# Altium PCB main.PcbDoc
Units mm, origin at the board's own origin, x right, y up, seen from the top; angles counter-clockwise.
Board outline 65.02 x 34.8 mm, 2 copper layers (Top Layer, Bottom Layer), stack 1.64 mm thick; 85 components, 60 nets, 273 pads, 80 vias.
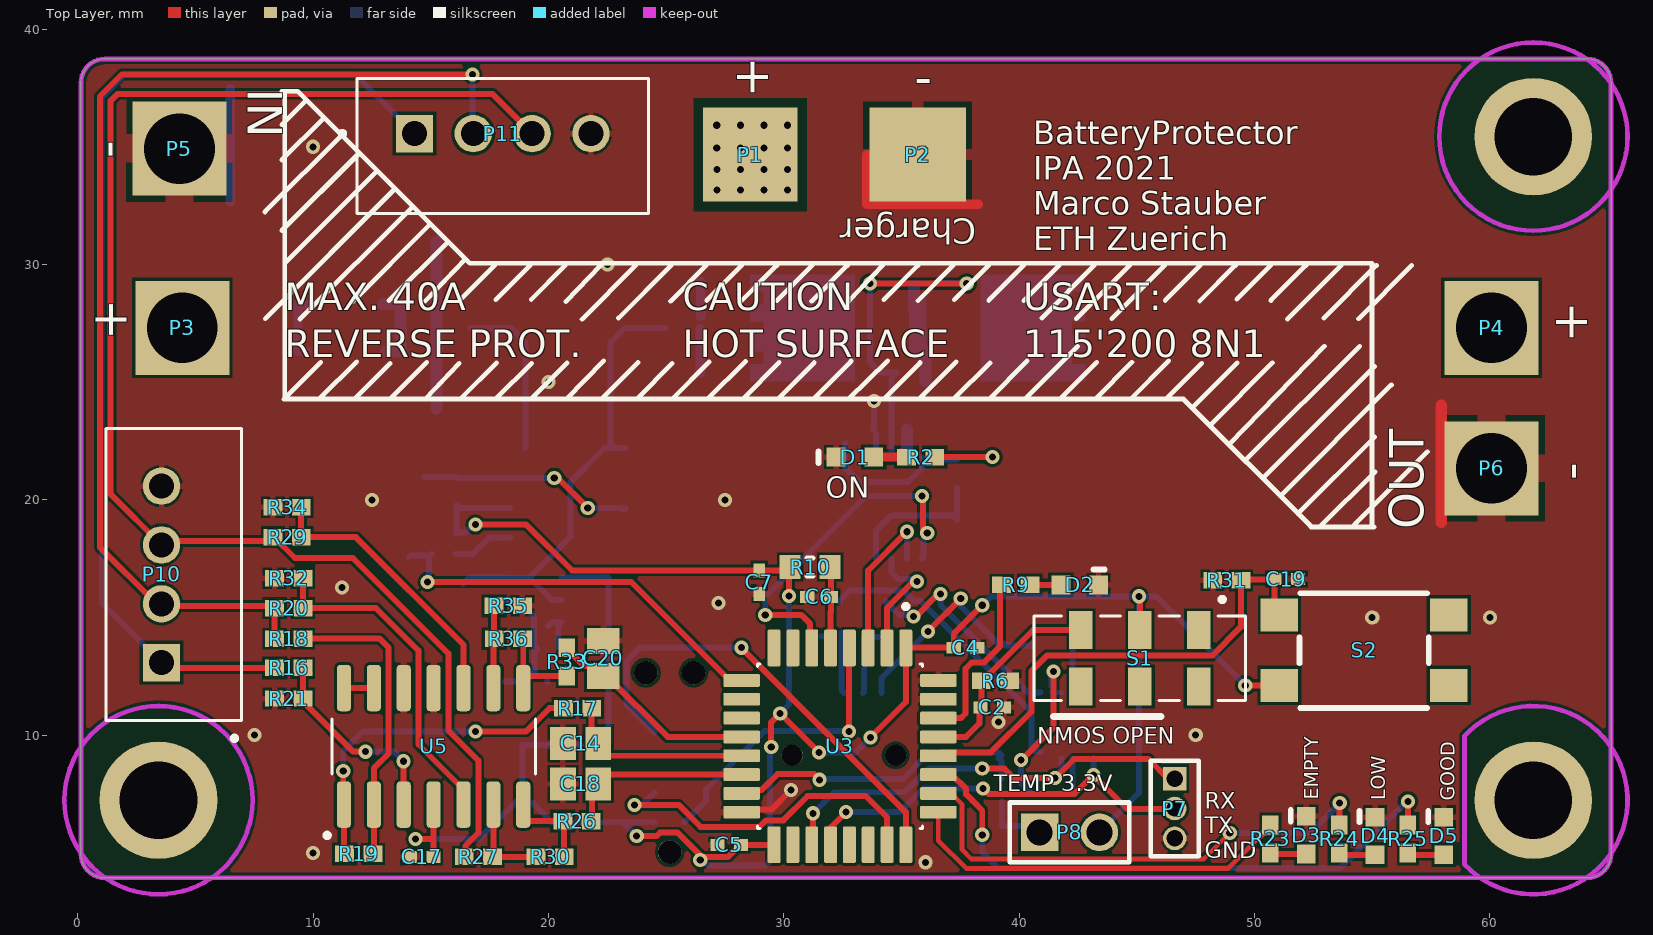
[diagram p0: Top Layer view]
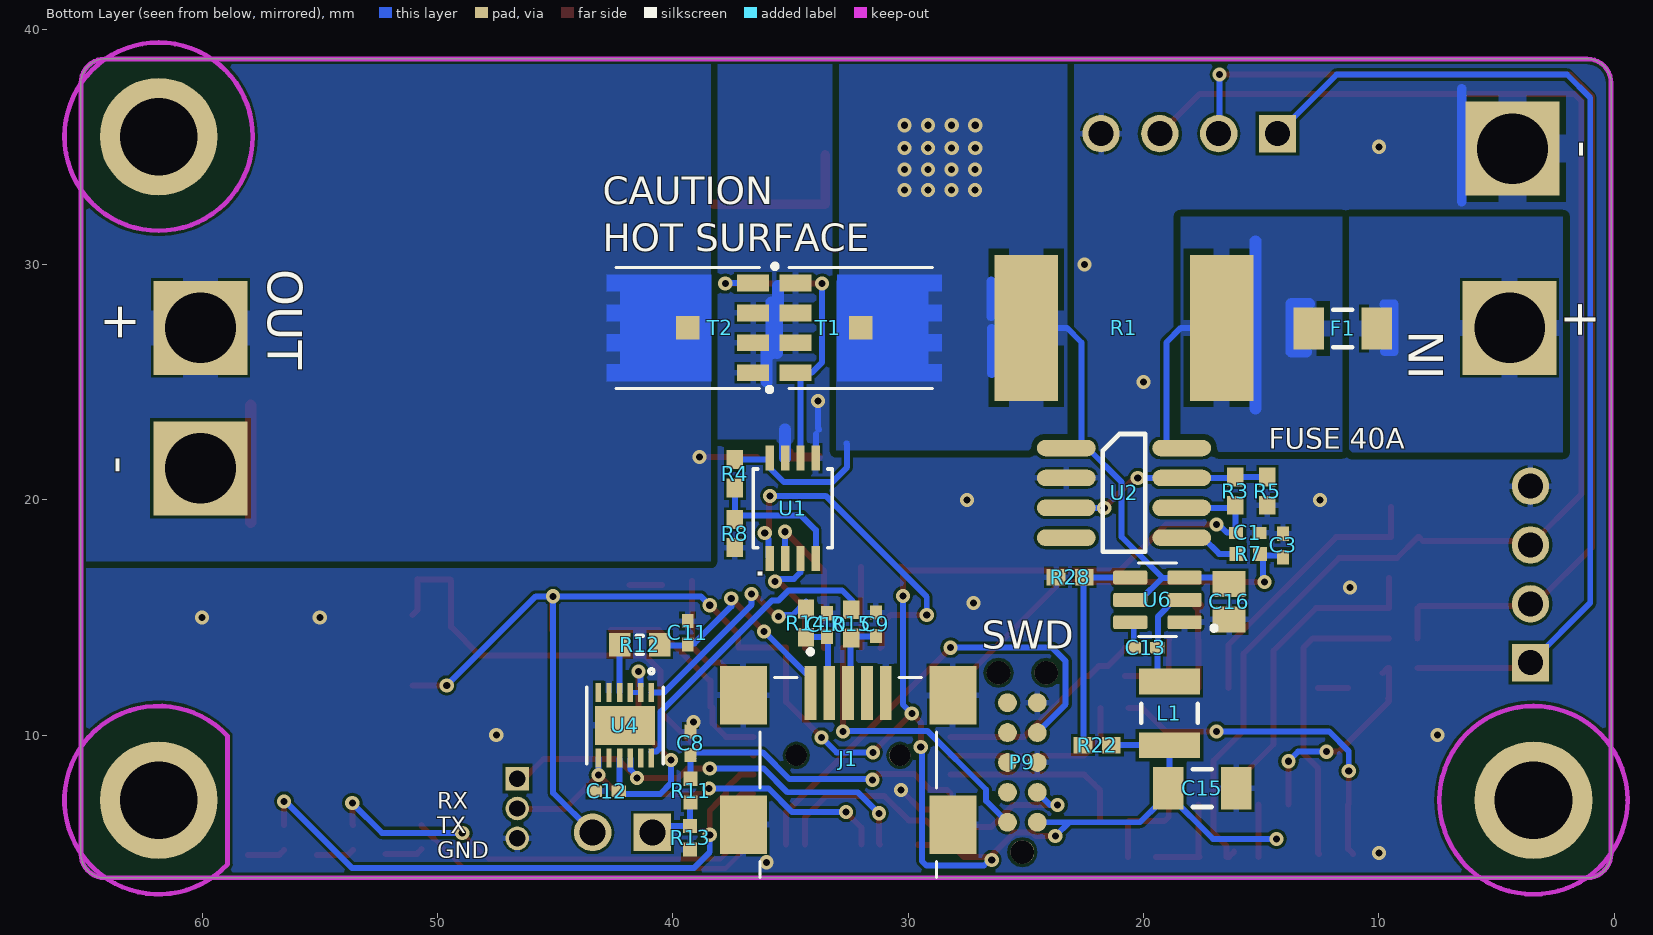
[diagram p1: Bottom Layer view, seen from below]
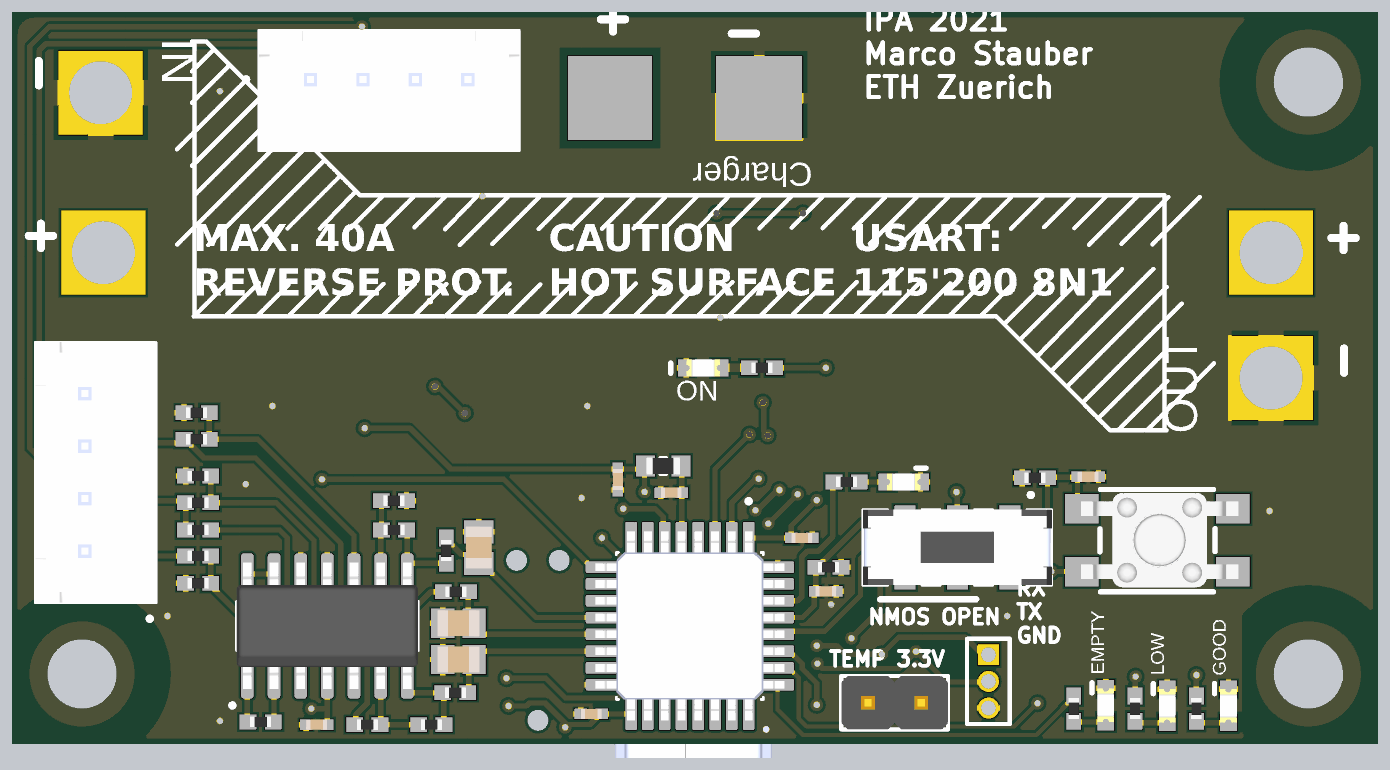
[diagram p2: 3D render of the assembled board from above, using the file's embedded part models]
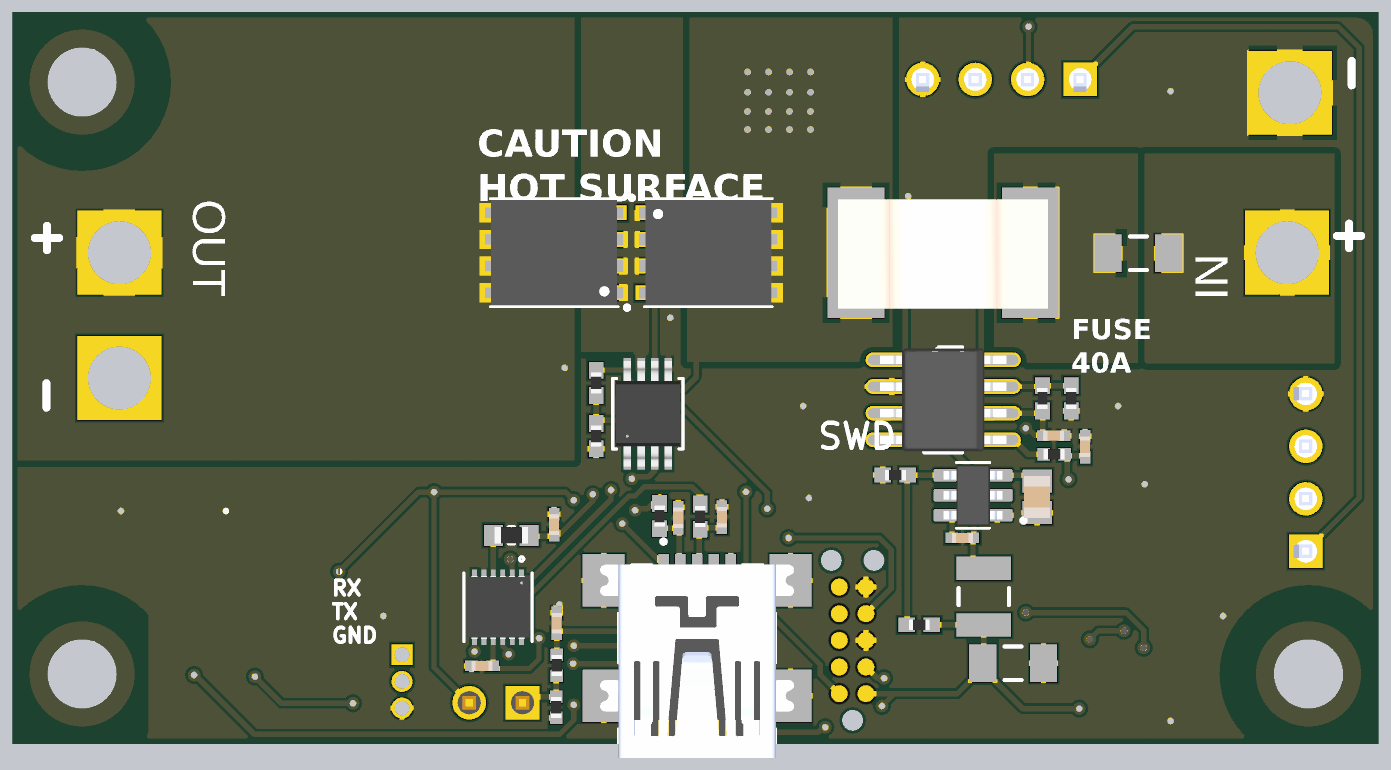
[diagram p3: 3D render of the assembled board from below, using the file's embedded part models]

## Layer stack, top to bottom
Top Solder: solder mask 0.0102, Solder Resist, Dk 3.5
Top Layer: signal copper 0.07
Dielectric 1: dielectric 1.5, FR-4, Dk 4.8
Bottom Layer: signal copper 0.07
Bottom Solder: solder mask 0.0102, Solder Resist, Dk 3.5

## Board outline
64.135,3.937 ccw(c64.135,4.953) 65.151,4.953 65.151,37.719 ccw(c64.135,37.719) 64.135,38.735 1.143,38.735 ccw(c1.143,37.723) 0.131,37.723 0.131,4.953 ccw(c1.146,4.953) 1.147,3.937 1.27,3.937

## Design rules (kind name [scope] priority, off if disabled: settings)
Clearance [InNet('VBAT') vs OnLayer('Top Layer')] p1: gap=0.127 ignorepadtopadclearanceinfootprint=FALSE except(0.2: Track-Track Track-THPad; 0.254: Track-Via THPad-THPad Via-Via; 0.3: Poly-Poly; 0.4: SMDPad-Poly)
Clearance Clearance_1 [All] p2: gap=0.127 ignorepadtopadclearanceinfootprint=FALSE except(0.2: Track-Track Track-THPad; 0.254: Track-Via THPad-THPad Via-Via; 0.3: Poly-Poly)
HoleSize [All] p1: absolutevalues=TRUE maxlimit=6.3 minlimit=0.025 maxpercent=80.000 minpercent=20.000
HoleToHoleClearance [All] p1: gap=0.2 allowstackedmicrovias=TRUE
PolygonConnect VBAT [InNet('VBAT') vs InNet('VBAT')] p1: thpad.connectstyle=Relief thpad.reliefconductorwidth=0.7 thpad.reliefentries=4 thpad.polygonreliefangle="90 Angle" thpad.airgapwidth=0.254 smdpad.connectstyle=Relief smdpad.reliefconductorwidth=1.5 smdpad.reliefentries=4 smdpad.polygonreliefangle="90 Angle" smdpad.airgapwidth=0.254 via.connectstyle=Direct via.reliefconductorwidth=0.254 via.reliefentries=4 via.polygonreliefangle="90 Angle" via.airgapwidth=0.254
PolygonConnect Fuse_Shaunt [InNet('NetF1_2') vs InNet('NetF1_2')] p2: thpad.connectstyle=Relief thpad.reliefconductorwidth=0.7 thpad.reliefentries=4 thpad.polygonreliefangle="90 Angle" thpad.airgapwidth=0.254 smdpad.connectstyle=Relief smdpad.reliefconductorwidth=0.7 smdpad.reliefentries=4 smdpad.polygonreliefangle="90 Angle" smdpad.airgapwidth=0.254 via.connectstyle=Relief via.reliefconductorwidth=0.254 via.reliefentries=4 via.polygonreliefangle="90 Angle" via.airgapwidth=0.254
PolygonConnect PWR_GND [InNet('GND') vs HasFootprint('AWG-10-Hole-1')] p3: thpad.connectstyle=Relief thpad.reliefconductorwidth=1.2 thpad.reliefentries=4 thpad.polygonreliefangle="90 Angle" thpad.airgapwidth=0.254 smdpad.connectstyle=Relief smdpad.reliefconductorwidth=0.5 smdpad.reliefentries=4 smdpad.polygonreliefangle="90 Angle" smdpad.airgapwidth=0.254 via.connectstyle=Relief via.reliefconductorwidth=0.5 via.reliefentries=4 via.polygonreliefangle="90 Angle" via.airgapwidth=0.254
PolygonConnect GND [InNet('GND') vs InNet('GND')] p4: thpad.connectstyle=Relief thpad.reliefconductorwidth=0.254 thpad.reliefentries=4 thpad.polygonreliefangle="90 Angle" thpad.airgapwidth=0.1 smdpad.connectstyle=Relief smdpad.reliefconductorwidth=0.254 smdpad.reliefentries=4 smdpad.polygonreliefangle="90 Angle" smdpad.airgapwidth=0.1 via.connectstyle=Direct via.reliefconductorwidth=0.254 via.reliefentries=4 via.polygonreliefangle="90 Angle" via.airgapwidth=0.1
PolygonConnect [All] p5: connectstyle=Relief reliefconductorwidth=0.254 reliefentries=4 polygonreliefangle="90 Angle" airgapwidth=0.1
RoomDefinition main [InComponentClass('main')] p1 off: confinementstyle=ConfineIn formatcopy=TRUE lockcomponents=FALSE outline 1.274,2547.747 6.227,2547.747 6.227,2548.865 1.274,2548.865
RoutingVias [All] p1: holewidth=0.3 width=0.6 viastyle="Through Hole" minholewidth=0.3 minwidth=0.6 maxholewidth=10 maxwidth=20
SilkToSolderMaskClearance [IsPad] p1: minsilkscreentomaskgap=0.15 clearancetoexposedcopper=TRUE
SolderMaskExpansion [All] p1: expansion=0.05
Width [All] p1: maxlimit=20 minlimit=0.2 preferedwidth=0.254
27 further rules are at their usual default settings.

## Components (designator, comment, footprint, x,y, rotation, side; value= is the part's Value field where it differs from the comment)
C1 "100nF" "CAP_0402i_1005m -L" 15.57,18.593 r0 bottom
C2 "100nF" "CAP_0402i_1005m -L" 38.862,11.176 r180 top
C3 "200nF" "CAP_0402i_1005m -L" 14.072,18.059 r90 bottom
C4 "100nF" "CAP_0402i_1005m -L" 37.719,13.716 r0 top
C5 "100nF" "CAP_0402i_1005m -L" 27.686,5.334 r180 top
C6 "100nF" "CAP_0402i_1005m -L" 31.496,15.875 r0 top
C7 "100nF" "CAP_0402i_1005m -L" 28.956,16.502 r90 top
C8 "200nF" "CAP_0402i_1005m -L" 39.243,9.652 r90 bottom
C9 "47pF" "CAP_0402i_1005m -L" 31.369,14.707 r270 bottom
C10 "47pF" "CAP_0402i_1005m -L" 33.452,14.681 r270 bottom
C11 "100nF" "CAP_0402i_1005m -L" 39.37,14.351 r270 bottom
C12 "100nF" "CAP_0402i_1005m -L" 42.799,7.62 r180 bottom
C13 "100nF" "CAP_0402i_1005m -L" 19.914,13.716 r180 bottom
C14 "2.2uF" "CAP_0805i_2012m -L" 21.361,9.652 r0 top
C15 "47uF" "CAP_1206i_3216m -n" 17.501,7.747 r0 bottom
C16 "10uF" "CAP_0805i_2012m -L" 16.358,15.672 r90 bottom
C17 "100nF" "CAP_0402i_1005m -L" 14.605,4.826 r0 top
C18 "2.2uF" "CAP_0805i_2012m -L" 21.361,7.925 r0 top
C19 "100nF" "CAP_0402i_1005m -L" 51.354,16.633 r180 top
C20 "2.2uF" "CAP_0805i_2012m -L" 22.327,13.259 r270 top
D1 "Green" 0603_LED 33.02,21.819 r0 top
D2 "Red" 0603_LED 42.57,16.383 r180 top
D3 "Red" 0603_LED 52.201,5.753 r270 top
D4 "Orange" 0603_LED 55.122,5.715 r270 top
D5 "Green" 0603_LED 58.043,5.715 r270 top
F1 "40A Fuse" FUSE_1206I_3216M_N 11.532,27.28 r0 bottom
J1 "690-005-299-043" EDAC_690-005-299-043 32.553,9.144 r180 bottom
L1 "3.3uH" "IND_1210i_3225m -L" 18.898,10.922 r270 bottom
P1 "Charger +" AWG-10-Hole-1#1 28.575,34.671 r0 top
P2 "Charger -" AWG-10-Hole-1#2 35.687,34.671 r0 top
P3 "BAT +" AWG-10-Hole-1#3 4.445,27.305 r0 top
P4 "OUT +" AWG-10-Hole-1#3 60.071,27.305 r270 top
P5 "BAT -" AWG-10-Hole-1#3 4.318,34.925 r0 top
P6 "OUT -" AWG-10-Hole-1#3 60.071,21.336 r270 top
P7 "Header 3" "1.27mm HDR1X3" 46.609,8.153 r270 top
P8 "Temp-Sensor" HDR1X2 40.869,5.867 r0 top
P9 "Tag-Connect TC2050-IDC-NL-No pin assigned" "TAG-CONNECT TC2050-IDC-NL 10-Pin" 24.511,6.299 r90 bottom
P10 "XH Bat Balancer" JST_B4B-XH-A(LF)(SN) 3.556,13.081 r90 top
P11 "XH Charger Balancer" JST_B4B-XH-A(LF)(SN) 14.304,35.56 r0 top
R1 "200u" WSL3921L2000FEA 20.832,27.305 r0 bottom
R2 "10k" "RES_0402i_1005m -N" 35.814,21.819 r180 top
R3 "12k" "RES_0402i_1005m -N" 16.104,20.371 r90 bottom
R4 "12k" "RES_0402i_1005m -N" 37.363,21.107 r270 bottom
R5 "10k" "RES_0402i_1005m -N" 14.732,20.371 r90 bottom
R6 "10k" "RES_0402i_1005m -N" 38.989,12.319 r180 top
R7 "8.2k" "RES_0402m_1005i -L" 15.545,17.704 r180 bottom
R8 "1.5k" "RES_0402i_1005m -N" 37.363,18.567 r90 bottom
R9 "1k" "RES_0402i_1005m -N" 39.853,16.383 r180 top
R10 "FRB 600" "RES_0603i_1608m -N" 31.115,17.145 r180 top
R11 "8.2k" "RES_0402m_1005i -L" 39.243,7.645 r90 bottom
R12 "FRB 600" "RES_0603i_1608m -N" 41.402,13.843 r180 bottom
R13 "?" "RES_0402m_1005i -L" 39.268,5.647 r90 bottom
R14 "27" "RES_0402i_1005m -N" 34.341,14.757 r270 bottom
R15 "27" "RES_0402i_1005m -N" 32.41,14.732 r270 bottom
R16 "220k" "RES_0402i_1005m -N" 8.963,12.858 r180 top
R17 "10k" "RES_0402i_1005m -N" 21.234,11.151 r0 top
R18 "220k" "RES_0402i_1005m -N" 8.963,14.097 r180 top
R19 "110k" "RES_0402i_1005m -N" 11.938,4.953 r0 top
R20 "220k" "RES_0402i_1005m -N" 8.963,15.398 r180 top
R21 "110k" "RES_0402i_1005m -N" 8.963,11.557 r0 top
R22 "33.2k" "RES_0402i_1005m -N" 21.971,9.576 r180 bottom
R23 "1k" "RES_0402i_1005m -N" 50.673,5.588 r90 top
R24 "1k" "RES_0402i_1005m -N" 53.594,5.588 r90 top
R25 "1k" "RES_0402i_1005m -N" 56.515,5.588 r90 top
R26 "10k" "RES_0402i_1005m -N" 21.209,6.35 r0 top
R27 "220k" "RES_0402i_1005m -N" 17.018,4.826 r180 top
R28 "10k" "RES_0402i_1005m -N" 23.114,16.713 r180 bottom
R29 "220k" "RES_0402i_1005m -N" 8.89,18.415 r180 top
R30 "110k" "RES_0402i_1005m -N" 20.066,4.826 r180 top
R31 "10k" "RES_0402i_1005m -N" 48.822,16.579 r0 top
R32 "110k" "RES_0402i_1005m -N" 8.963,16.668 r0 top
R33 "10k" "RES_0402i_1005m -N" 20.777,13.116 r90 top
R34 "110k" "RES_0402i_1005m -N" 8.89,19.685 r0 top
R35 "220k" "RES_0402i_1005m -N" 18.288,15.494 r0 top
R36 "110k" "RES_0402i_1005m -N" 18.292,14.097 r0 top
S1 "JS202011JCQN" SW_JS202011JCQN 45.125,13.265 r270 top
S2 "TL3305AF160QG" TL3305AF160QG 51.054,15.113 r0 top
T1 "CSD16570Q5B" CSD16570Q5B 32.021,27.305 r180 bottom
T2 "CSD16570Q5B" CSD16570Q5B 39.361,27.305 r0 bottom
U1 "MAX1614EUA+T" 21-0036K_MXM-L 34.9,19.634 r90 bottom
U2 "INA286AIDR" D0008A_M 20.828,20.295 r180 bottom value=Value
U3 "STM32L051K6T6" QFP80P900X900X160-32N 32.385,9.525 r270 top
U4 "FT234XD-R" DFN-12_FTD 42.037,10.414 r270 bottom
U5 "LM324KADR" SOIC127P600X175-14N 15.117,9.525 r90 top
U6 "TPS561201DDCR" SOT95P280X110-6N 19.406,15.748 r0 bottom

## Footprints (in the part's own frame and the unit in brackets; to place one, negate y for a bottom-side part, rotate by r counter-clockwise, add the part's x,y. Pads: shape width x height; smd on the part's side, far side on the other; paste and mask are expansions set on the pad)
"1.27mm HDR1X3" [mm] "Connector; Header; 1.27mm pitch; 3Position"
  rect 1x1 hole 0.7: 1(0,0)
  round 1 hole 0.7: 2(1.27,0) 3(2.54,0)
  silkscreen extent -0.76,-1.02 3.3,1.02
21-0036K_MXM-L [mil]
  rect 41.75x14 smd paste+0 mask+0: 1(-84.03,38.4) 2(-84.03,12.8) 3(-84.03,-12.8) 4(-84.03,-38.4) 5(84.03,-38.4) 6(84.03,-12.8) 7(84.03,12.8) 8(84.03,38.4)
  silkscreen extent -66,-66 66,66, body extent -99,-61 99,61, height 43
0603_LED [mm]
  rect 0.8x0.8 smd: 1(-0.8,0) 2(0.8,0)
  silkscreen extent -1.55,-0.25 -1.55,0.23, body extent -0.8,-0.4 0.8,0.4, height 0.65
AWG-10-Hole-1#1 [mm]
  rect 4x4 smd: 1(0,0)
AWG-10-Hole-1#2 [mm]
  rect 4.1x4 smd: 1(0,0)
AWG-10-Hole-1#3 [mm]
  rect 4x4 hole 3: 1(0,0)
"CAP_0402i_1005m -L" [mm] "Chip Capacitor, Body 1.0x0.5mm, IPC High Density"
  rect 0.6x0.5 smd: 1(-0.5,0) 2(0.5,0)
  body extent -0.5,-0.25 0.5,0.25, height 0.5
"CAP_0805i_2012m -L" [mm] "Chip Capacitor, Body 2.0x1.3mm, IPC High Density"
  rect 1.1x1.4 smd: 1(-0.75,0) 2(0.75,0)
  body extent -1,-0.62 1,0.63, height 0.6
"CAP_1206i_3216m -n" [mm] "Chip Capacitor, Body 3.2x1.6mm, IPC Medium Density"
  rect 1.3x1.8 smd: 1(-1.45,0) 2(1.45,0)
  silkscreen extent -0.4,-0.8 0.4,0.8, body extent -1.7,-0.9 1.7,0.9, height 1.35
CSD16570Q5B [mm] "Power NMOS"
  rect 1.372x0.71 smd paste-2: 1(-2.77,-0.635) 1(-2.77,0.635) 1(-2.77,1.905) 2(-2.77,-1.905)
  rect 1x1 smd: 3(0,0)
  Top Layer region: 3.456,1.55 2.866,1.55 2.866,0.99 3.456,0.99 3.456,0.28 2.866,0.28 2.866,-0.28 3.456,-0.28 3.456,-0.99 2.866,-0.99 2.866,-1.55 3.456,-1.55 3.456,-2.26 -0.984,-2.26 -0.984,2.26 3.456,2.26
  silkscreen extent -3.74,-2.58 3.05,2.72, body extent -3,-2.5 3,2.5, height 1.05
D0008A_M [mm]
  oval 2.5x0.7 smd paste-0.102 mask+0.051: 1(-2.45,1.905) 2(-2.45,0.635) 3(-2.45,-0.635) 4(-2.45,-1.905) 5(2.45,-1.905) 6(2.45,-0.635) 7(2.45,0.635) 8(2.45,1.905)
  silkscreen extent -0.9,-2.5 0.9,2.5, body extent -3.01,-2.45 3.01,2.45, height 1.63
DFN-12_FTD [mm]
  rect 0.808x0.229 smd paste+0 mask+0: 1(-1.395,1.125) 2(-1.395,0.675) 3(-1.395,0.225) 4(-1.395,-0.225) 5(-1.395,-0.675) 6(-1.395,-1.125) 7(1.395,-1.125) 8(1.395,-0.675) 9(1.395,-0.225) 10(1.395,0.225) 11(1.395,0.675) 12(1.395,1.125)
  rect 1.651x2.54 smd paste+0 mask+0: 13(0,0)
  silkscreen extent -2.4,-1.63 1.63,1.63, body extent -1.5,-1.5 1.5,1.5, height 0.81
EDAC_690-005-299-043 [mm]
  rect 0.5x2.3 smd: 1(-1.6,2.65) 2(-0.8,2.65) 3(0,2.65) 4(0.8,2.65) 5(1.6,2.65)
  rect 2x2.5 smd: S1(-4.45,2.55) S2(4.45,2.55) S3(4.45,-2.95) S4(-4.45,-2.95)
  round 0.9 hole 0.9 unplated: ""(-2.2,0) ""(2.2,0)
  silkscreen extent -3.75,-5.2 3.75,4.5, body extent -4.62,-5.9 4.62,3.3, height 3.98
FUSE_1206I_3216M_N [mm]
  rect 1.3x1.8 smd: 1(-1.45,0) 2(1.45,0)
  silkscreen extent -0.4,-0.8 0.4,0.8, body extent -1.68,-0.89 1.68,0.89, height 0.6
HDR1X2 [mm] "Connector; Header; 2 Position"
  rect 1.6x1.6 hole 1.1: 1(0,0)
  round 1.6 hole 1.1: 2(2.54,0)
  silkscreen extent -1.27,-1.27 3.81,1.27, body extent -1.27,-1.27 3.81,1.27, height 10.3
"IND_1210i_3225m -L" [mm] "Chip Inductor, Body 3.2x2.5mm, IPC High Density"
  rect 1.1x2.6 smd: 1(-1.35,0) 2(1.35,0)
  silkscreen extent -0.4,-1.2 0.4,1.2, body extent -1.7,-1.35 1.7,1.35, height 1.5
JST_B4B-XH-A(LF)(SN) [mm]
  rect 1.59x1.59 hole 1.06: 1(0,0)
  round 1.59 hole 1.06: 2(2.5,0) 3(5,0) 4(7.5,0)
  silkscreen extent -3.31,-3.4 9.95,2.35, body extent -2.44,-3.41 9.96,2.34, height 7
QFP80P900X900X160-32N [mm]
  rrect25% 1.56x0.55 smd: 1(-4.18,2.8) 2(-4.18,2) 3(-4.18,1.2) 4(-4.18,0.4) 5(-4.18,-0.4) 6(-4.18,-1.2) 7(-4.18,-2) 8(-4.18,-2.8) 17(4.18,-2.8) 18(4.18,-2) 19(4.18,-1.2) 20(4.18,-0.4) 21(4.18,0.4) 22(4.18,1.2) 23(4.18,2) 24(4.18,2.8)
  rrect25% 0.55x1.56 smd: 9(-2.8,-4.18) 10(-2,-4.18) 11(-1.2,-4.18) 12(-0.4,-4.18) 13(0.4,-4.18) 14(1.2,-4.18) 15(2,-4.18) 16(2.8,-4.18) 25(2.8,4.18) 26(2,4.18) 27(1.2,4.18) 28(0.4,4.18) 29(-0.4,4.18) 30(-1.2,4.18) 31(-2,4.18) 32(-2.8,4.18)
  silkscreen extent -6.04,-3.5 3.5,3.5, body extent -4.5,-4.5 4.5,4.5, height 1.61
"RES_0402i_1005m -N" [mm] "Chip Resistor, Body 1.1x0.5mm, IPC Medium Density"
  rect 0.8x0.7 smd: 1(-0.6,0) 2(0.6,0)
  body extent -0.5,-0.25 0.5,0.25, height 0.3
"RES_0402m_1005i -L" [mm] "Chip Resistor, Body 1.1x0.5mm, IPC High Density"
  rect 0.6x0.6 smd: 1(-0.5,0) 2(0.5,0)
  body extent -0.5,-0.25 0.5,0.25, height 0.3
"RES_0603i_1608m -N" [mm] "Chip Resistor, Body 1.6x0.8mm, IPC Medium Density"
  rect 0.9x1 smd: 1(-0.85,0) 2(0.85,0)
  silkscreen extent -0.13,-0.38 0.13,0.38, body extent -0.8,-0.4 0.8,0.4, height 0.4
SOIC127P600X175-14N [mm]
  rrect50% 1.97x0.6 smd: 1(-2.475,3.81) 2(-2.475,2.54) 3(-2.475,1.27) 4(-2.475,0) 5(-2.475,-1.27) 6(-2.475,-2.54) 7(-2.475,-3.81) 8(2.475,-3.81) 9(2.475,-2.54) 10(2.475,-1.27) 11(2.475,0) 12(2.475,1.27) 13(2.475,2.54) 14(2.475,3.81)
  silkscreen extent -3.88,-4.33 1.17,4.62, body extent -3.01,-4.32 3.01,4.32, height 1.75
SOT95P280X110-6N [mm]
  rrect25% 1.45x0.59 smd: 1(-1.155,0.95) 2(-1.155,0) 3(-1.155,-0.95) 4(1.155,-0.95) 5(1.155,0) 6(1.155,0.95)
  silkscreen extent -2.5,-1.57 0.8,1.57, body extent -1.4,-1.45 1.4,1.45, height 1.1
SW_JS202011JCQN [mm]
  rect 1.6x1 smd: 1(-1.2,2.5) 2(-1.2,0) 3(-1.2,-2.5) 5(1.2,2.5) 6(1.2,0) 7(1.2,-2.5)
  silkscreen extent -2.6,-4.5 1.8,4.5, body extent -1.8,-4.5 1.8,4.5, height 5.6
"TAG-CONNECT TC2050-IDC-NL 10-Pin" [mm] "Tag-Connect TC2050-IDC-NL 10-Pin No-Legs Cable with Ribbon connector."
  round 1 hole 1 unplated paste-2 mask+0: 0(-1.27,0.635) 0(6.35,-0.38) 0(6.35,1.65)
  round 0.8 smd paste-1 mask+0.102: 1(0,0) 2(1.27,0) 3(2.54,0) 4(3.81,0) 5(5.08,0) 6(5.08,1.27) 7(3.81,1.27) 8(2.54,1.27) 9(1.27,1.27) 10(0,1.27)
TL3305AF160QG [mm]
  rect 1.6x1.4 smd: 1(0,-3) 2(7.2,-3) 3(0,0) 4(7.2,0)
  silkscreen extent 0.86,-3.96 6.35,0.91, body extent -0.04,-3.75 7.46,0.75, height 3.8
WSL3921L2000FEA [mm] "RES 200 UOHM 1% 3W"
  rect 2.7x6.2 smd: 1(-4.15,0) 2(4.15,0)
  body extent -5,-2.54 5,2.66, height 0.83

## Part data
C1 C2 C3 C4 C5 C6 C7 C8 C9 C10 C11 C12 C13 C14 C15 C16 C17 C18 C19 C20: library part Cap, "capacitor"
D1 D2 D3 D4 D5: library part LTST-C191KRKT, "Red 631nm LED Indication - Discrete 2V 0603 _1608 Metric_", Package="0603 Lite-On", Digi-Key_Part_Number=160-1447-1-ND, Digi-Key_Purchase_URL=https://www.digikey.in/product-detail/en/lite-on-inc/LTST-C191KRKT/160-1447-1-ND/386836?utm_source=snapeda&utm_medium=aggregator&utm_campaign=symbol, MF="Lite-On Inc.", MP=LTST-C191KRKT, SnapEDA_Link=https://www.snapeda.com/parts/LTST-C191KRKT/Lite-On%20Inc./view-part/234319/?ref=snap
F1: library part Fuse, "Fuse"
J1: "USB - mini B USB 2.0 Receptacle Connector 5 Position Surface Mount, Right Angle", Package=None, Availability=Good, Check_prices=https://www.snapeda.com/parts/690-005-299-043/EDAC%20Inc./view-part/347309/?ref=eda, MF="EDAC Inc.", MP=690-005-299-043, Price=None, Purchase-URL=https://pricing.snapeda.com/search/part/690-005-299-043/?ref=eda, SnapEDA_Link=https://www.snapeda.com/parts/690-005-299-043/EDAC%20Inc./view-part/347309/?ref=snap
L1: library part Inductor, "Inductor"
P1 P2 P3 P4 P5 P6: library part Pin
P7: "Header, 3-Pin"
P8: library part "Header 2", "Header, 2-Pin"
P9: "10-pin pogo pin programing port"
P10 P11: library part "Header 4", "Header, 4-Pin"
R1: library part WSL3921L2000FEA, "RES 200 UOHM 1% 3W"
R2 R3 R4 R5 R6 R7 R8 R9 R10 R11 R12 R13 R14 R15 R16 R17 R18 R19 R20 R21 R22 R23 R24 R25 R26 R27 R28 R29 R30 R31 R32 R33 R34 R35 R36: library part Res, "Resistor"
S1: "Slide Switch DPDT Surface Mount", Package=None, Availability=Good, MF=C&K, MP=JS202011JCQN, Price=None, Purchase-URL=https://pricing.snapeda.com/search/part/JS202011JCQN/?ref=eda, SnapEDA_Link=https://www.snapeda.com/parts/JS202011JCQN/C&K/view-part/587766/?ref=snap
T1 T2: "Power NMOS", Built_By=EMA_UL_Team, Copyright="Copyright (C) 2018 Accelerated Designs. All rights reserved", Manufacturer_Part_Number=CSD16570Q5B, RefDes=RefDes, Type=DEV, Vendor="Texas Instruments"
U1 U4: "No Description Available", Built_By=EMA_UL_Team, Copyright="Copyright (C) 2018 Accelerated Designs. All rights reserved", RefDes=RefDes, Type=DEV
  U1: Manufacturer_Part_Number=MAX1614EUA+T, Revision=2, SourceLibrary=Maxim_2014-04-30_1, Vendor="Maxim Integrated Products"
  U4: Manufacturer_Part_Number=FT234XD-R, SourceLibrary=FTDI_2017-04-18, Vendor="FTDI, Future Technology Devices International Ltd"
U2: "No Description Available", Alternate_PartNumber=INA286AID, Manufacturer="Texas Instruments", CompType=IC, Copyright="Copyright (C) 2018 Accelerated Designs. All rights reserved", MountType=SMT, PackageReference=D0008A, PartNumber=INA286AIDR, PIN_COUNT=8, RefDes=RefDes, RoHS=Y, Type=DEV
U3: "ARM® Cortex®-M0+ STM32L0 Microcontroller IC 32-Bit 32MHz 32KB (32K x 8) FLASH 32-LQFP (7x7)", Package="LQFP-32 STMicroelectronics", Availability=Bad, Check_prices=https://www.snapeda.com/parts/STM32L051K6T6/STMicroelectronics/view-part/555945/?ref=eda, MF=STMicroelectronics, MP=STM32L051K6T6, Price=None, SnapEDA_Link=https://www.snapeda.com/parts/STM32L051K6T6/STMicroelectronics/view-part/555945/?ref=snap
U5: Package=None, Availability=Unavailable, MP=LMC6044IM/NOPB, Price=None
U6: "4.5V to 17V Input, 1A Synchronous Step-Down Voltage Regulator in 6-pin SOT-23 6-SOT-23-THIN -40 to 125", Package="SOT-23-THN-6 Texas Instruments", Arrow_Electronics-Purchase-URL=https://snapeda.com/shop?store=Arrow+Electronics&id=1775281, Availability=Good, DigiKey-Purchase-URL=https://snapeda.com/shop?store=DigiKey&id=1775281, MF="Texas Instruments", Mouser-Purchase-URL=https://snapeda.com/shop?store=Mouser&id=1775281, MP=TPS561201DDCR, Price=None, SnapEDA_Link=https://www.snapeda.com/parts/TPS561201DDCR/Texas%20Instruments/view-part/1775281/?ref=snap, Texas_Instruments-Purchase-URL=https://snapeda.com/shop?store=Texas+Instruments&id=1775281

## Free pads (board coordinates)
  round 5 hole 3.3 unplated paste+0: 0(3.429,7.239) 0(61.849,7.239) 0(61.849,35.433)

## Via types
v1: diameter 0.6, hole 0.3, Top Layer to Bottom Layer, tented both sides, 80 vias

## Nets (pads, with @x,y where several pads share a name; then routed paths per layer and width w, separated by ;. In a path a pad name is that pad's centre, name@x,y a point inside that pad or via, vN(x,y) a via of type N, cw(c..) or ccw(c..) an arc to the next point about the centre after c; other vN are vias at no path point)
+3.3: C1.2 C4.1 C5.1 C7.2 C15.2 C17.2 L1.2 P8.2 P9.1 R3.1 R10.2 R22.2 S1.2 S2.1 U2.6 U3.1 U3.17 U5.4 | length 100.8
  Top Layer w0.254: v1(14.351,5.588) 15.111,5.588 ; C17.2 15.111,4.832 15.111,5.588 ; U5.4 15.111,7.044 15.111,5.588 ; v1(16.891,18.948) 19.05,18.948 20.996,17.002 C7.2 30.122,17.002 R10.2 ; v1(23.747,5.713) 24.593,5.713 24.736,5.856 25.489,5.856 26.515,4.83 27.632,4.83 28.136,5.334 C5.1 29.574,5.334 U3.17 ; v1(29.464,9.5) 29.464,10.541 v1(29.845,10.922) v1(31.496,9.271) ; v1(30.226,15.913) 30.226,17.039 R10.2@30.362,17.175 ; v1(33.68,9.906) 35.185,11.411 U3.1 35.196,13.716 C4.1 37.219,14.308 v1(38.43,15.519) ; v1(45.085,15.9) 45.125,15.86 S1.2 ; v1(49.606,12.116) 51.051,12.116 S2.1
  Bottom Layer w0.254: v1(14.351,5.588) 17.043,5.588 18.951,7.495 C15.2 18.898,7.8 L1.2 18.901,9.576 R22.2 ; C1.2 C1.2@16.087,18.609 ; v1(16.891,18.948) 16.797,18.948 16.458,18.609 C1.2@16.087,18.609 ; U2.6@18.364,19.66 16.215,19.66 R3.1 16.087,19.754 C1.2@16.087,18.609 ; C15.2@19.335,7.113 20.148,6.299 23.161,6.299 ; L1.2@19.939,9.572 L1.2@19.992,9.519 ; v1(23.747,5.713) 23.161,6.299 ; P9.1 23.161,6.299 ; v1(26.448,4.699) 26.541,4.699 26.776,4.464 29.229,4.464 29.418,4.653 29.418,9.454 v1(29.464,9.5) ; v1(29.845,10.922) 30.226,11.303 v1(30.226,15.913) v1@30.137,15.913 ; v1(31.496,9.271) 33.045,9.271 v1(33.68,9.906) ; v1(38.43,15.519) 38.811,15.9 v1(45.085,15.9) ; P8.2 45.085,7.544 v1(45.085,15.9) ; v1(49.606,12.116) 45.822,15.9 v1(45.085,15.9)
GND: C1.1 C2.1 C3.2 C4.2 C5.2 C6.1 C7.1 C8.2 C9.1 C10.1 C11.1 C12.1 C14.1 C15.1 C16.1 C17.1 C18.1 C19.1 C20.1 D1.1 D2.1 D3.1 D4.1 D5.1 J1.5 J1.S1 J1.S2 J1.S3 J1.S4 P2.1 P5.1 P6.1 P7.3 P9.3 P9.5 P10.4 P11.4 R5.1 R6.1 R8.1 R13.1 R21.1 R28.1 R31.1 R32.1 R34.1 R35.2 U1.5 U2.2 U3.16 U3.31 U3.32 U4.5 U4.13 U5.11 U5.12 U6.1 | length 21.4
  Top Layer w0.254: U3.16 28.313,6.833 29.464,6.833 v1(30.302,7.671)
  Top Layer w0.4: 33.528,34.671 33.528,32.563 38.252,32.563
  Top Layer w0.5: 57.937,19.05 57.937,24.003
  Bottom Layer w0.254: 33.784,22.987 33.833,23.036 v1(33.833,24.206) ; U1.5@33.908,21.753 U1.5 33.924,22.792
  Bottom Layer w0.4: 6.477,32.671 6.477,37.468
  other v1: 36.017,4.597 10,5 7.5,10 47.5,10 39.116,10.552 55,15 60,15 27.229,15.621 11.227,16.281 12.5,20 27.5,20 20,25 22.5,30 10,35
NetC2_2: C2.2 R6.2 S1.3 U3.29 | length 9
  Top Layer w0.254: U3.29 37.738,9.925 38.312,10.499 38.312,11.176 C2.2 38.389,11.203 R6.2 38.439,12.319 40.585,14.465 S1.3
NetC3_1: C3.1 R7.2 U3.9 | length 17.3
  Top Layer w0.254: v1(14.859,16.51) 23.515,16.51 27.7,12.325 U3.9
  Bottom Layer w0.254: C3.1 14.144,17.632 R7.2@14.973,17.632 ; v1(14.859,16.51) 14.925,16.576 14.925,17.584 R7.2@14.973,17.632 ; R7.2 R7.2@14.973,17.632
NetC6_2: C6.2 R10.1 U3.5 | length 3.4
  Top Layer w0.254: U3.5 31.991,13.711 31.991,15.235 31.996,15.24 C6.2 R10.1@31.996,17.145
NetC8_1: C8.1 R11.2 U3.15 | length 13
  Top Layer w0.254: U3.15 28.353,7.673 29.06,7.673 29.739,8.352 31.272,8.352 v1(31.521,8.103)
  Bottom Layer w0.254: v1(31.521,8.103) 31.547,8.128 35.044,8.128 36.182,9.266 39.129,9.266 C8.1 39.243,9.14 C8.1@39.12,9.017 ; R11.2 C8.1@39.243,8.898
NetC9_2: C9.2 J1.3 R15.2 | length 3.1
  Bottom Layer w0.254: C9.2@31.603,14.202 R15.2@32.109,14.202 ; R15.2@32.456,14.356 32.456,11.891 J1.3
NetC10_2: C10.2 J1.2 R14.2 | length 3
  Bottom Layer w0.254: J1.2 33.402,11.843 33.402,14.173 R14.2@34.036,14.173
NetC11_2: C11.2 J1.1 R12.2 | length 9.5
  Top Layer w0.254: v1(36.119,14.402) v1(37.516,15.799)
  Bottom Layer w0.254: J1.1 34.153,12.436 v1(36.119,14.402) ; v1(37.516,15.799) 37.516,15.471 39.086,13.901 39.37,13.901 C11.2 39.37,13.801 R12.2@40.552,13.801 ; R12.2@40.544,13.851 R12.2
NetC12_2: C12.2 U4.2 U4.3 U4.9 | length 10.2
  Top Layer w0.254: v1(40.081,8.941) 41.455,10.314 v1(41.455,12.7)
  Bottom Layer w0.2: U4.2 U4.3
  Bottom Layer w0.254: v1(40.081,8.941) 40.081,7.95 40.534,7.498 42.127,7.498 42.274,7.645 U4.9@42.274,9.007 ; U4.2@41.374,12.086 41.374,12.526 41.455,12.606 v1(41.455,12.7)
NetC13_1: C13.1 U6.6 | length 1.8
  Bottom Layer w0.254: U6.6@19.971,14.63 20.139,14.798 U6.6 20.414,14.651 C13.1
NetC13_2: C13.2 L1.1 U6.2 | length 5.8
  Bottom Layer w0.254: U6.2@17.821,15.748 U6.2 18.681,15.748 19.38,15.048 19.38,13.814 19.503,13.691 C13.2@19.541,13.691 ; L1.1@18.148,12.272 L1.1 18.991,12.272 19.414,12.695 C13.2 ; L1.1@19.939,12.272 L1.1@19.947,12.28
NetC14_2: C14.2 R17.2 U3.13 | length 8
  Top Layer w0.254: R17.2 21.834,9.929 C14.2 22.111,9.548 22.534,9.125 U3.13
NetC18_2: C18.2 R26.2 U3.14 | length 8
  Top Layer w0.254: R26.2 21.844,6.385 21.844,7.657 C18.2 22.512,8.325 U3.14
NetC19_2: C19.2 R31.2 S2.3 U3.28 | length 21.2
  Top Layer w0.254: U3.28 36.706,9.266 38.793,9.266 40.513,10.986 40.513,12.721 41.173,13.381 48.2,13.381 49.422,14.603 R31.2 49.449,16.606 50.827,16.606 C19.2 50.854,15.313 S2.3
NetC20_2: C20.2 R33.2 U3.12 | length 9
  Top Layer w0.254: R33.2 20.777,13.666 21.511,12.932 21.904,12.932 C20.2 22.477,12.509 25.06,9.925 U3.12
NetD1_2: D1.2 R2.2 | length 1.7
  Top Layer w0.254: R2.2@34.989,22.044 R2.2
  Top Layer w0.4: D1.2 R2.2
NetD2_2: D2.2 R9.1 | length 1.4
  Top Layer w0.254: R9.1 D2.2@41.847,16.383
NetD3_2: D3.2 R23.1 | length 1.6
  Top Layer w0.254: R23.1@50.677,5.153 50.877,4.953 D3.2
NetD4_2: D4.2 R24.1 | length 1.6
  Top Layer w0.254: R24.1@53.598,5.115 53.798,4.915 D4.2
NetD5_2: D5.2 R25.1 | length 1.6
  Top Layer w0.254: R25.1@56.519,5.115 56.719,4.915 D5.2
NetF1_1: F1.1 P3.1 | length 2.8
  Bottom Layer w0.4: 9.757,26.305 9.357,26.305 9.357,28.305 9.779,28.305
NetF1_2: F1.2 R1.1 U2.8 | length 17.6
  Bottom Layer w0.254: R1.1 18.413,27.305 19.025,26.693 U2.8@19.025,22.225
  Bottom Layer w0.5: 12.954,28.321 13.716,28.321 13.716,26.289 13.081,26.289 ; 15.24,23.876 15.24,30.988
NetP4_1: P4.1 R2.1 T2.3 | length 2.4
  Top Layer w0.254: R2.1 v1(38.862,21.819)
NetP7_1: P7.1 U3.19 U4.10 | length 19.1
  Top Layer w0.254: U3.19 31.242,5.402 v1(31.242,6.68) ; v1(38.43,8.585) 39.37,8.585 39.776,8.179 v1(41.529,8.179) 42.337,8.987 45.496,8.987 P7.1@46.355,8.128
  Bottom Layer w0.254: v1(31.242,6.68) 32.136,7.574 35.132,7.574 36.143,8.585 v1(38.43,8.585) ; v1(41.529,8.179) 41.529,8.272 41.8,8.543 U4.10@41.8,9.007
NetP7_2: P7.2 U3.20 U4.7 | length 17.5
  Top Layer w0.254: U3.20 31.985,6.077 v1(32.639,6.731) ; v1(38.461,7.731) 38.695,7.498 42.347,7.498 v1(43.155,8.306) 44.602,6.858 P7.2@46.355,6.858
  Bottom Layer w0.254: v1(32.639,6.731) 34.931,6.731 35.931,7.731 v1(38.461,7.731) ; v1(43.155,8.306) 43.155,9.012 U4.7
NetP8_1: P8.1 R11.1 R13.2 | length 2.9
  Bottom Layer w0.254: R11.1@39.268,7.171 R13.2 40.589,6.147 P8.1 ; P8.1@40.746,5.842 P8.1@40.873,5.715
NetP9_2: P9.2 U3.23 | length 14.3
  Top Layer w0.254: v1(23.647,7.036) 25.527,7.036 26.467,6.096 28.962,6.096 29.245,6.379 29.978,6.379 31.011,7.412 33.482,7.412 34.385,6.509 U3.23
  Bottom Layer w0.254: v1(23.647,7.036) 23.978,7.036 P9.2
NetP9_4: P9.4 U3.24 | length 19.9
  Top Layer w0.254: v1@28.191,13.713 28.197,13.713 35.185,6.725 U3.24
  Bottom Layer w0.254: P9.4 23.304,11.316 23.304,13.144 23.876,13.716 v1(28.194,13.716)
NetP9_10: P9.10 U3.4 | length 12.4
  Top Layer w0.254: v1(32.766,10.16) 32.766,13.686 U3.4
  Bottom Layer w0.254: P9.10 26.694,7.212 26.694,7.693 29.182,10.181 32.745,10.181 v1(32.766,10.16)
NetP10_1: P10.1 P11.1 R16.2 | length 44.7
  Top Layer w0.254: P10.1 3.779,12.858 R16.2
  Bottom Layer w0.254: P10.1 1.016,15.621 1.016,37.084 2.007,38.075 11.789,38.075 P11.1
NetP10_2: P10.2 P11.2 R18.2 R20.2 | length 47.7
  Top Layer w0.254: R18.2 R20.2 8.271,15.49 3.647,15.49 P10.2 3.396,15.741 3.182,15.741 1.016,17.907 0.943,17.98 0.943,37.145 1.873,38.075 v1(16.764,38.075)
  Bottom Layer w0.254: v1(16.764,38.075) 16.764,35.6 P11.2
NetP10_3: P10.3 P11.3 R27.2 R29.2 | length 62.7
  Top Layer w0.254: R27.2@16.145,5.049 16.368,4.826 R27.2 16.468,4.826 16.468,5.292 17.018,5.842 17.018,8.921 15.748,10.191 15.748,13.462 11.684,17.526 9.229,17.526 8.34,18.415 R29.2 8.123,18.248 3.723,18.248 P10.3 1.397,20.24 1.397,36.957 1.692,37.252 17.612,37.252 P11.3
NetR3_2: R3.2 R5.2 U2.3 U2.7 | length 9.2
  Top Layer w0.254: v1(20.244,20.93) 20.396,20.93 v1(21.666,19.66)
  Bottom Layer w0.254: R5.2 R3.2 16.145,20.93 U2.7 v1(20.244,20.93) ; v1(21.666,19.66) U2.3 U2.3@23.202,19.583
NetR4_2: R4.2 R8.2 U1.4 | length 6.3
  Bottom Layer w0.254: U1.4 33.924,18.71 34.544,19.329 37.201,19.329 R8.2 R4.2
NetR7_1: R7.1 U2.5 | length 2.6
  Bottom Layer w0.254: R7.1 16.784,17.704 17.47,18.39 U2.5
NetR9_2: R9.2 U3.30 | length 7.8
  Top Layer w0.254: U3.30 37.522,10.725 37.719,10.922 37.719,12.827 37.973,13.081 38.493,13.081 39.192,13.78 R9.2@39.192,16.543
NetR12_1: R12.1 U4.4 | length 2
  Bottom Layer w0.254: R12.1 42.262,13.833 U4.4
NetR14_1: R14.1 U4.1 | length 9.3
  Top Layer w0.254: v1(35.509,15.037) 35.598,15.037 36.563,16.002 v1(36.652,16.002)
  Bottom Layer w0.254: R14.1@34.341,15.678 34.341,15.628 34.564,15.405 34.614,15.405 34.916,15.103 35.443,15.103 v1(35.509,15.037) ; v1(36.652,16.002) 36.652,15.545 40.388,11.809 U4.1
NetR15_1: R15.1 U4.12 | length 12.5
  Bottom Layer w0.254: R15.1@32.36,15.653 32.36,15.703 32.811,16.154 35.08,16.154 35.516,15.718 35.791,15.718 40.513,10.996 40.513,9.483 40.7,9.296 40.9,9.296 U4.12@40.912,9.284
NetR16_1: R16.1 R21.2 U5.3 | length 9
  Top Layer w0.254: R16.1@9.836,12.635 9.613,12.858 R16.1 R21.2 9.563,11.436 11.703,9.296 v1(12.217,9.296) ; v1(13.843,8.89) 13.845,8.888 U5.3 U5.3
  Bottom Layer w0.254: v1(12.217,9.296) 13.437,9.296 v1(13.843,8.89)
NetR17_1: R17.1 R19.1 U5.1 | length 14.6
  Top Layer w0.254: R19.1@11.088,4.953 11.307,5.172 U5.1 11.278,7.079 v1(11.278,8.484) ; v1(16.891,10.16) 19.05,10.16 20.041,11.151 R17.1
  Bottom Layer w0.254: v1(11.278,8.484) 11.278,9.32 12.118,10.16 v1(16.891,10.16)
NetR18_1: R18.1 R19.2 U5.2 | length 12.8
  Top Layer w0.254: R18.1 12.827,14.097 13.208,13.716 13.208,9.22 12.577,8.589 U5.2 12.577,4.992 R19.2
NetR20_1: R20.1 R32.2 U5.5 | length 14.3
  Top Layer w0.254: R32.2 R20.1 12.669,15.398 14.478,13.589 14.478,9.601 16.387,7.693 U5.5
NetR22_1: R22.1 R28.2 U6.4 | length 9.1
  Bottom Layer w0.254: U6.4 20.568,16.706 22.506,16.706 R28.2 22.55,16.677 22.55,9.657 R22.1@22.469,9.576
NetR23_2: R23.2 U3.25 | length 16.6
  Top Layer w0.2: U3.25 36.565,5.523 37.751,4.337 48.885,4.337 50.16,5.613
  Top Layer w0.254: 50.16,5.613 50.16,5.625 50.673,6.138 R23.2
NetR24_2: R24.2 U3.26 | length 21.3
  Top Layer w0.2: U3.26 37.101,7.525 37.572,7.054 37.572,5.125 37.959,4.738 47.842,4.738 v1(48.946,5.842)
  Top Layer w0.254: R24.2 53.607,6.201 53.607,7.099 v1(53.619,7.112)
  Bottom Layer w0.254: v1(48.946,5.842) 52.349,5.842 v1(53.619,7.112)
NetR25_2: R25.2 U3.27 | length 24.9
  Top Layer w0.254: U3.27 37.139,8.325 37.744,7.72 37.744,7.485 37.999,7.231 38.43,6.799 v1(38.43,5.766) ; R25.2 v1(56.515,7.188)
  Bottom Layer w0.254: v1(38.43,5.766) 38.43,5.026 39.092,4.364 53.64,4.364 56.464,7.188 v1(56.515,7.188)
NetR26_1: R26.1 R30.1 U5.7 | length 3.8
  Top Layer w0.254: U5.7 18.927,6.521 19.098,6.35 R26.1 20.666,6.293 R30.1
NetR27_1: R27.1 R30.2 U5.6 | length 4.1
  Top Layer w0.254: U5.6 17.657,4.865 R27.1 R30.2
NetR29_1: R29.1 R34.2 U5.10 | length 11.9
  Top Layer w0.254: R34.2 R29.1 11.811,18.415 16.387,13.839 U5.10
NetR33_1: R33.1 R36.2 U5.8 | length 4
  Top Layer w0.254: R36.2 18.927,14.062 U5.8@18.927,12.345 ; U5.8 U5.8@18.927,12.345 ; R33.1 19.098,12.516 U5.8@18.927,12.345
NetR35_1: R35.1 R36.1 U5.9 | length 3.5
  Top Layer w0.254: U5.9 17.657,14.062 R36.1 17.692,15.49 R35.1
NetT1_1: T1.1 T2.1 U1.7 | length 7.9
  Bottom Layer w0.5: U1.7 35.23,21.774 35.23,22.987 ; 35.528,29.083 35.528,28.116 35.577,28.067 35.577,26.443 ; 35.577,26.243 35.577,26.443 ; 35.805,28.395 35.805,26.215 35.577,26.443 ; 36.017,25.019 36.017,26.314
NetT1_2: T1.2 T2.2 U1.6 | length 13.7
  Top Layer w0.254: v1(33.655,29.185) v1(37.77,29.185)
  Bottom Layer w0.254: v1(33.655,29.185) 33.655,25.838 34.093,25.4 T1.2 34.574,25.184 U1.6 ; T2.2 37.744,29.21 v1(37.77,29.185)
NetU1_1: U1.1 U3.6 | length 15.3
  Top Layer w0.254: v1(29.21,15.113) 30.734,15.113 31.115,14.732 31.115,13.775 U3.6 ; v1(35.865,20.168) 35.911,20.122 35.911,18.75 36.068,18.593 v1(36.093,18.593)
  Bottom Layer w0.254: v1@29.276,15.179 v1(29.21,15.113) 29.21,15.875 33.503,20.168 v1(35.865,20.168) ; U1.1 35.926,17.551 35.926,18.332 36.093,18.499 v1(36.093,18.593)
NetU1_2: U1.2 U3.3 | length 6.8
  Top Layer w0.254: U3.3 33.585,16.999 v1(35.23,18.644)
  Bottom Layer w0.254: U1.2 35.227,17.502 35.227,18.641 v1(35.23,18.644)
NetU1_3: U1.3 U3.2 | length 5.3
  Top Layer w0.254: U3.2 34.385,15.411 35.509,16.535 v1(35.662,16.535)
  Bottom Layer w0.254: U1.3 34.574,16.918 34.859,16.634 35.563,16.634 v1(35.662,16.535)
NetU5_13: U5.13 U5.14 | length 1.3
  Top Layer w0.254: U5.14 U5.13
VBAT: C16.2 P1.1 R1.2 R4.1 T1.3 U1.8 U2.1 U6.3 U6.5 | length 29.8
  Bottom Layer w0.254: C16.2 16.634,16.698 U6.3 18.261,16.688 19.191,16.688 ; U6.5 20.131,15.748 19.191,16.688 ; U2.1 U2.1@22.837,22.2 ; R1.2 23.251,27.305 22.631,26.686 22.631,22.406 U2.1@22.837,22.2 ; 32.614,22.403 32.588,22.377 32.588,21.387 33.223,20.752 35.275,20.752 35.875,21.352 U1.8 35.926,21.718 37.353,21.718 R4.1 ; 19.191,16.688 20.925,18.422 20.925,20.746 22.378,22.2 U2.1@22.837,22.2
  Bottom Layer w0.4: 26.441,25.375 26.441,27.28 ; 26.467,27.788 26.467,29.286
  other v1: 27.153,33.172 28.153,33.172 29.153,33.172 30.153,33.172 27.153,34.036 28.153,34.036 29.153,34.036 30.153,34.036 27.149,34.95 28.15,34.95 29.15,34.95 30.15,34.95 27.149,35.916 28.15,35.916 29.15,35.916 30.15,35.916
pads on no net: J1. J1.4 P9.0 P9.6 P9.7 P9.8 P9.9 S1.1 S1.5 S1.6 S1.7 S2.2 S2.4 U2.4 U3.7 U3.8 U3.10 U3.11 U3.18 U3.21 U3.22 U4.6 U4.8 U4.11

## Polygon pours and split planes (outlines as drawn)
GND on Bottom Layer "Top Layer-GND" (solid, remove dead copper, pour order 12): 0.127,38.735 0.127,3.937 65.151,3.937 65.151,38.735
NetT1_1 on Bottom Layer "NMOS-NMOS" (solid, remove dead copper, pour order 3): 38.313,38.735 38.313,22.581 35.585,22.581 35.585,21.035 34.874,21.035 34.874,22.581 33.233,22.581 33.233,38.735
NetP4_1 on Bottom Layer "NMOS-OUT" (solid, remove dead copper, pour order 1): 38.386,38.735 38.386,17.399 65.151,17.399 65.151,38.735
NetF1_1 on Bottom Layer "TOP_GND" (solid, pour order 8): 2.195,32.029 11.557,32.029 11.557,22.022 2.195,22.022
NetF1_2 on Bottom Layer "Fuse-Shaunt" (solid, pour order 7): 11.557,32.029 18.415,32.029 18.415,22.047 11.557,22.047
VBAT on Bottom Layer "CHARGE" (solid, pour order 5): 33.045,38.735 23.241,38.735 23.241,22.098 33.045,22.098
no net on Top Overlay (none, remove dead copper, pour order 13): 16.662,30.048 9.347,37.363 8.788,37.363 8.788,24.282 46.99,24.282 52.4,18.872 52.4,18.847 54.991,18.847 54.991,30.048
GND on Top Layer "TOP_GND" (solid, remove dead copper, pour order 10): 0.127,38.735 0.127,3.937 65.151,3.937 65.151,38.735

## Keep-outs
Keep-Out Layer:
  lines w0.2: 58.917,4.518 ccw(c61.849,7.239) 58.92,9.963 58.92,4.521 ; 65.151,4.953 cw(c64.135,4.953) 64.135,3.937 1.27,3.937 1.147,3.937 cw(c1.146,4.953) 0.131,4.953 0.131,37.723 cw(c1.143,37.723) 1.143,38.735 64.135,38.735 cw(c64.135,37.719) 65.151,37.719 65.151,4.953 ; 65.151,4.953 65.151,4.953 ; 7.429,7.239 ccw(c3.429,7.239) 7.429,7.239 ; 65.849,35.433 ccw(c61.849,35.433) 65.849,35.433

## Silkscreen, mask and mechanical layers (free items; w line width, h text height)
Top Overlay:
  lines w0.2: 7.95,32.233 11.252,35.535 ; 7.963,27.699 13.475,33.21 ; 8.661,31.445 11.963,34.747 ; 8.661,34.442 10.439,36.22 ; 8.661,35.941 9.703,36.982 ; 8.661,37.363 9.296,37.363 9.347,37.363 16.662,30.048 ; 8.674,31.432 11.913,34.671 ; 8.75,24.27 10.325,25.845 ; 8.788,30.048 12.649,33.909 ; 9.436,27.673 14.224,32.461 ; 10.135,29.87 13.437,33.172 ; 10.287,24.308 11.849,25.87 ; 11.659,28.397 14.961,31.699 ; 11.773,24.295 13.271,25.794 ; 13.221,28.461 15.71,30.95 ; 13.259,24.282 14.821,25.845 ; 16.231,28.473 17.716,29.959 ; 16.281,24.308 17.793,25.819 ; 17.755,28.499 19.215,29.959 ; 17.767,24.295 19.279,25.806 ; 19.253,24.282 20.79,25.819 ; 19.266,28.511 20.714,29.959 ; 21.425,27.673 23.711,29.959 ; 22.25,24.282 23.8,25.832 ; 22.974,27.724 25.209,29.959 ; 23.762,24.295 25.26,25.794 ; 25.184,28.435 26.708,29.959 ; 25.248,24.282 26.822,25.857 ; 28.194,28.448 29.705,29.959 ; 28.245,24.282 29.807,25.845 ; 29.705,28.461 31.204,29.959 ; 29.756,24.295 31.293,25.832 ; 31.178,28.435 32.703,29.959 ; 31.242,24.282 32.855,25.895 ; 34.239,24.282 35.789,25.832 ; 34.239,28.499 35.7,29.959 ; 35.7,28.461 37.198,29.959 ; 35.75,24.295 37.325,25.87 ; 37.224,24.295 38.756,25.81 ; 37.236,28.499 38.697,29.959 ; 40.195,28.461 41.694,29.959 ; 40.234,24.282 42.481,26.53 ; 40.957,27.724 43.193,29.959 ; 41.745,24.295 43.294,25.845 ; 42.431,27.699 44.691,29.959 ; 43.231,24.282 44.793,25.845 ; 46.203,28.473 47.688,29.959 ; 46.228,24.282 47.752,25.806 ; 46.99,24.257 52.4,18.847 55.093,18.847 ; 47.358,23.914 49.263,25.819 ; 47.676,28.448 49.187,29.959 ; 48.12,23.177 50.762,25.819 ; 49.251,28.524 50.686,29.959 ; 49.657,21.717 54.47,26.53 ; 50.368,20.93 55.105,25.667 ; 51.092,20.155 55.816,24.879 ; 51.397,27.673 53.683,29.959 ; 51.841,19.406 55.105,22.669 ; 52.781,18.847 55.131,21.196 ; 52.946,27.724 55.181,29.959 ; 54.242,18.936 57.347,22.041 ; 54.419,27.699 56.68,29.959 ; 14.757,24.282 16.205,25.806 14.757,24.282 ; 14.757,28.448 16.474,30.237 14.757,28.448 ; 20.726,28.423 22.212,29.959 20.726,28.423 ; 20.752,24.282 22.352,25.908 20.752,24.282 ; 26.721,28.473 28.207,29.959 26.721,28.473 ; 26.746,24.282 28.372,25.883 26.746,24.282 ; 32.741,24.282 34.417,25.908 32.741,24.282 ; 32.766,28.448 34.201,29.959 32.766,28.448 ; 38.71,28.473 40.195,29.959 38.71,28.473 ; 38.722,24.27 40.335,25.908 38.722,24.27 ; 43.929,27.699 46.19,29.959 43.929,27.699 ; 44.729,24.282 46.355,25.908 44.729,24.282 ; 48.92,22.352 52.972,26.53 48.92,22.352 ; 50.698,28.473 52.184,29.959 50.698,28.473
  lines w0.3: 41.453,10.795 46.025,10.795
  text "-" at 36.297,38.354 h1.52 r180
  text "IN" at 6.731,37.465 h2.5 r270
  text "+" at 29.337,37.084 h1.52 r90
  text "-" at 1.981,34.519 h1.52 r90
  text "Charger" at 38.176,32.309 h1.8 r180
  text "BatteryProtector / IPA 2021 / Marco Stauber / ETH Zuerich" at 40.589,30.607 h1
  text "+" at 2.083,26.772 h1.52 r90
  text "+" at 64.135,26.67 h1.52 r90
  text "MAX. 40A  / REVERSE PROT." at 8.788,25.679 h2
  text "CAUTION / HOT SURFACE" at 25.705,25.679 h2
  text "USART: / 115'200 8N1" at 40.183,25.679 h2
  text "-" at 64.16,20.828 h1.52 r90
  text "ON" at 31.775,19.787 h1.52
  text "OUT" at 57.683,18.745 h2.5 r90
  text "NMOS OPEN" at 40.768,9.628 h0.7
  text "TEMP 3.3V" at 38.913,7.62 h0.7
  text "EMPTY" at 52.908,7.264 h1 r90
  text "LOW" at 55.753,7.239 h1 r90
  text "GOOD" at 58.699,7.214 h1 r90
  text "RX / TX / GND" at 47.879,4.775 h0.7
Bottom Overlay:
  text "-" at 1.981,34.519 h1.52 r90
  text "CAUTION / HOT SURFACE" at 42.977,30.175 h2
  text "OUT" at 57.709,29.794 h2.5 r90
  text "+" at 2.108,26.772 h1.52 r90
  text "+" at 64.135,26.67 h1.52 r90
  text "IN" at 6.782,25.095 h2.5 r270
  text "FUSE 40A" at 14.681,21.869 h1.5
  text "-" at 64.16,21.844 h1.52 r90
  text "SWD" at 26.873,13.665 h1.2
  text "RX / TX / GND" at 50.013,4.775 h0.7
Mechanical 1:
  lines w0.2: 65.151,4.953 cw(c64.135,4.953) 64.135,3.937 1.27,3.937 1.147,3.937 cw(c1.146,4.953) 0.131,4.953 0.131,37.723 cw(c1.143,37.723) 1.143,38.735 64.135,38.735 cw(c64.135,37.719) 65.151,37.719 65.151,4.953 ; 65.151,4.953 65.151,4.953

## Text inside footprints (layer, text, board x,y; h text height)
J1: Mechanical 13 "PCB EDGE" at 26.753,4.084 h0.81